# Altium PCB 2002A.PcbDoc
Units mil, origin at the board's own origin, x right, y up, seen from the top; angles counter-clockwise.
Board outline 4300 x 2895 mil, 2 copper layers (Top Layer, Bottom Layer); 26 components, 37 nets, 150 pads, 1 vias.
Unrouted connection lines stored in the file: 1.
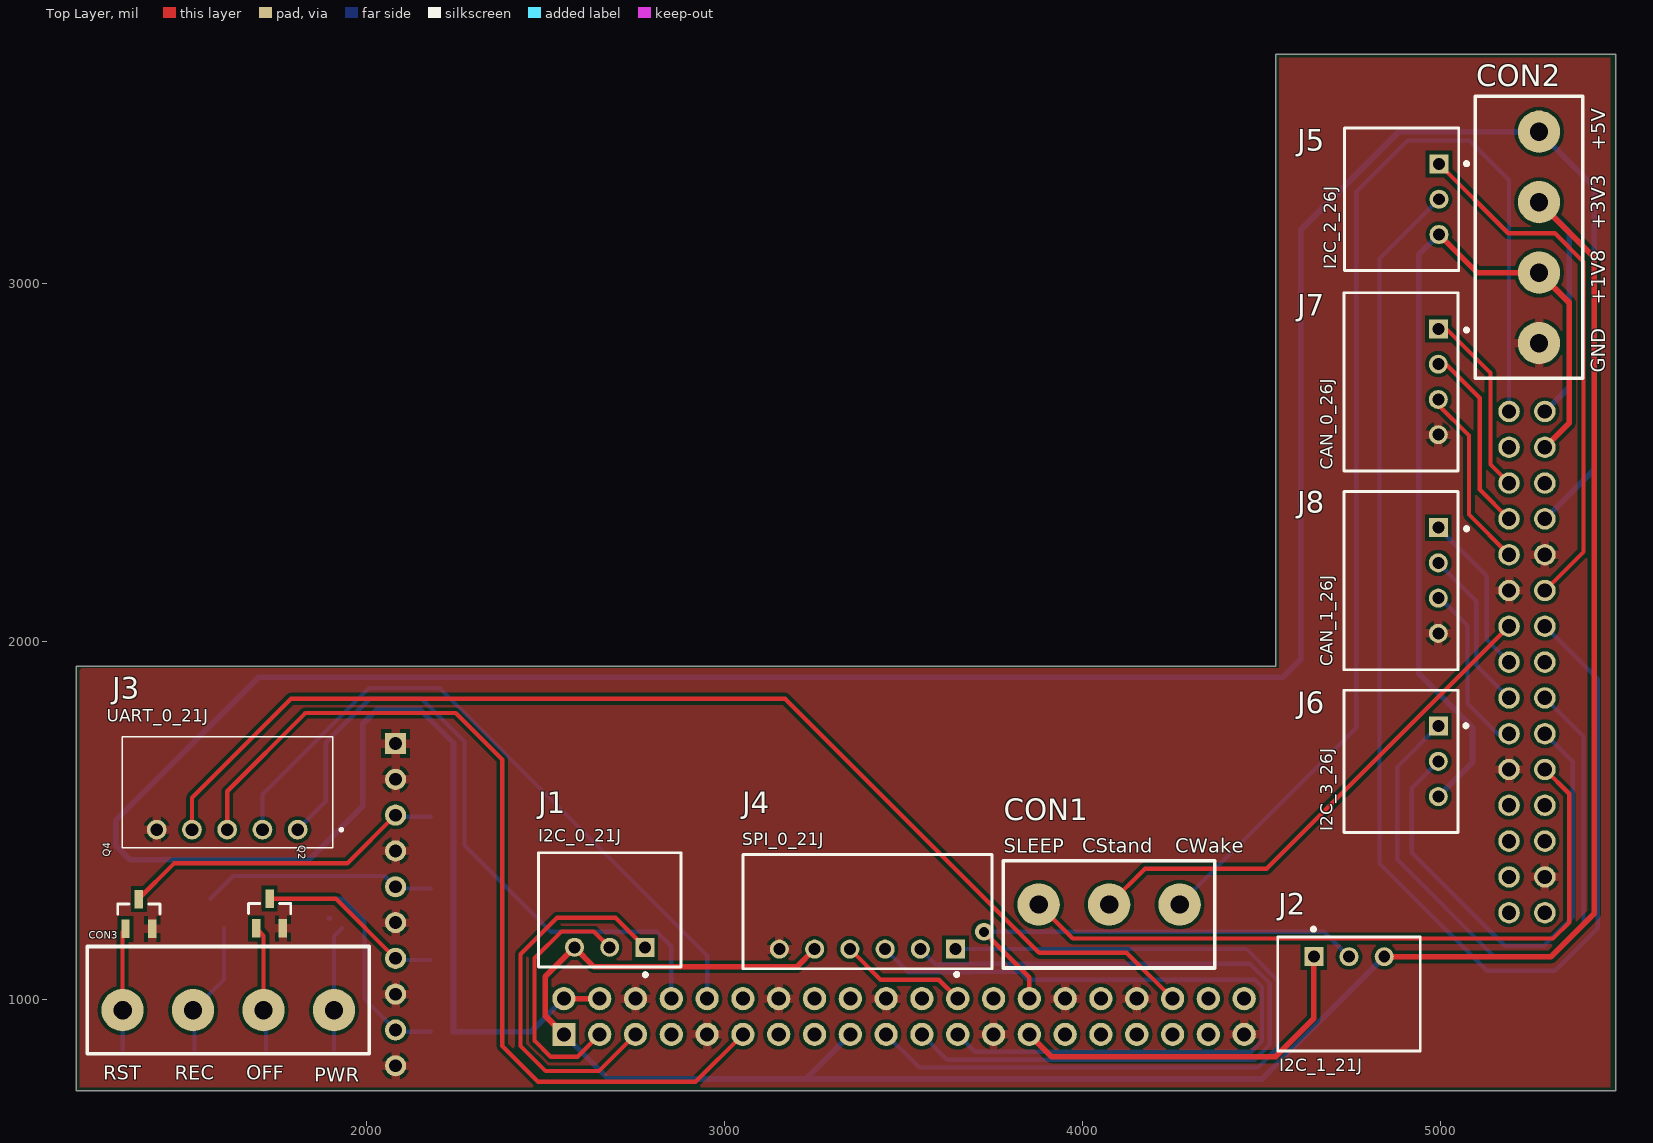
[diagram p0: Top Layer view]
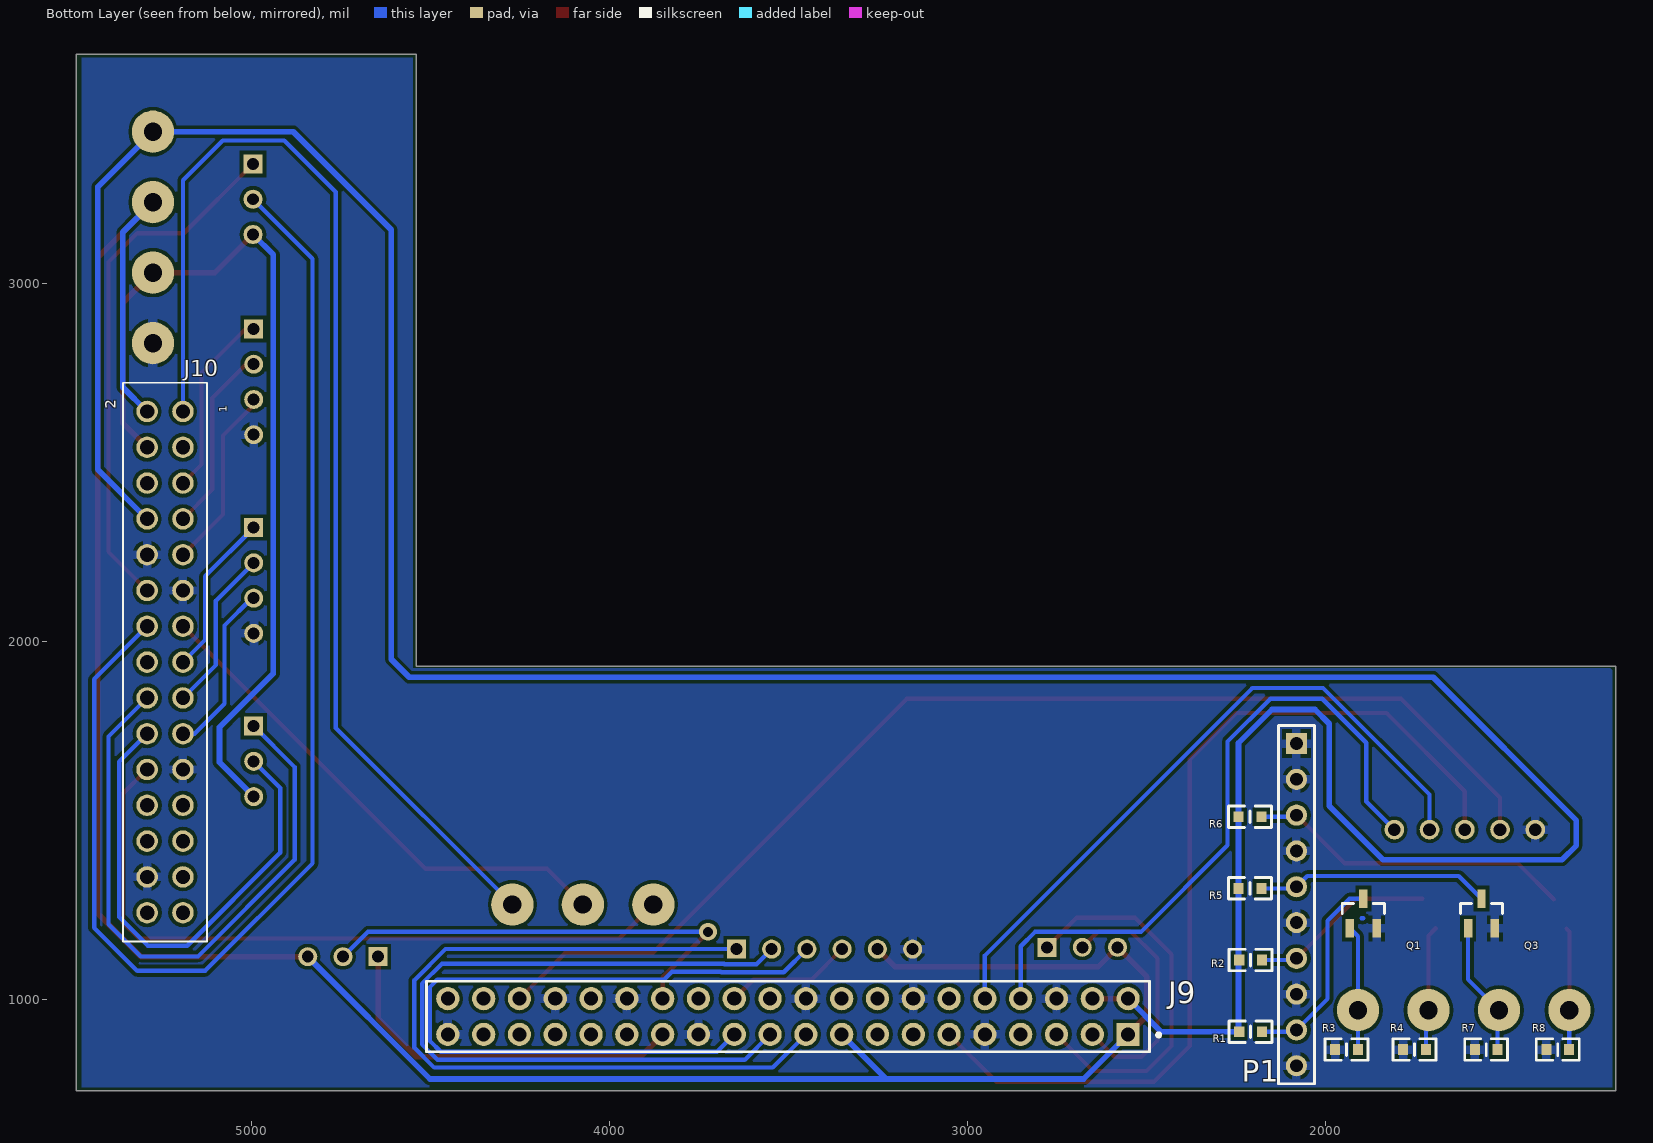
[diagram p1: Bottom Layer view, seen from below]
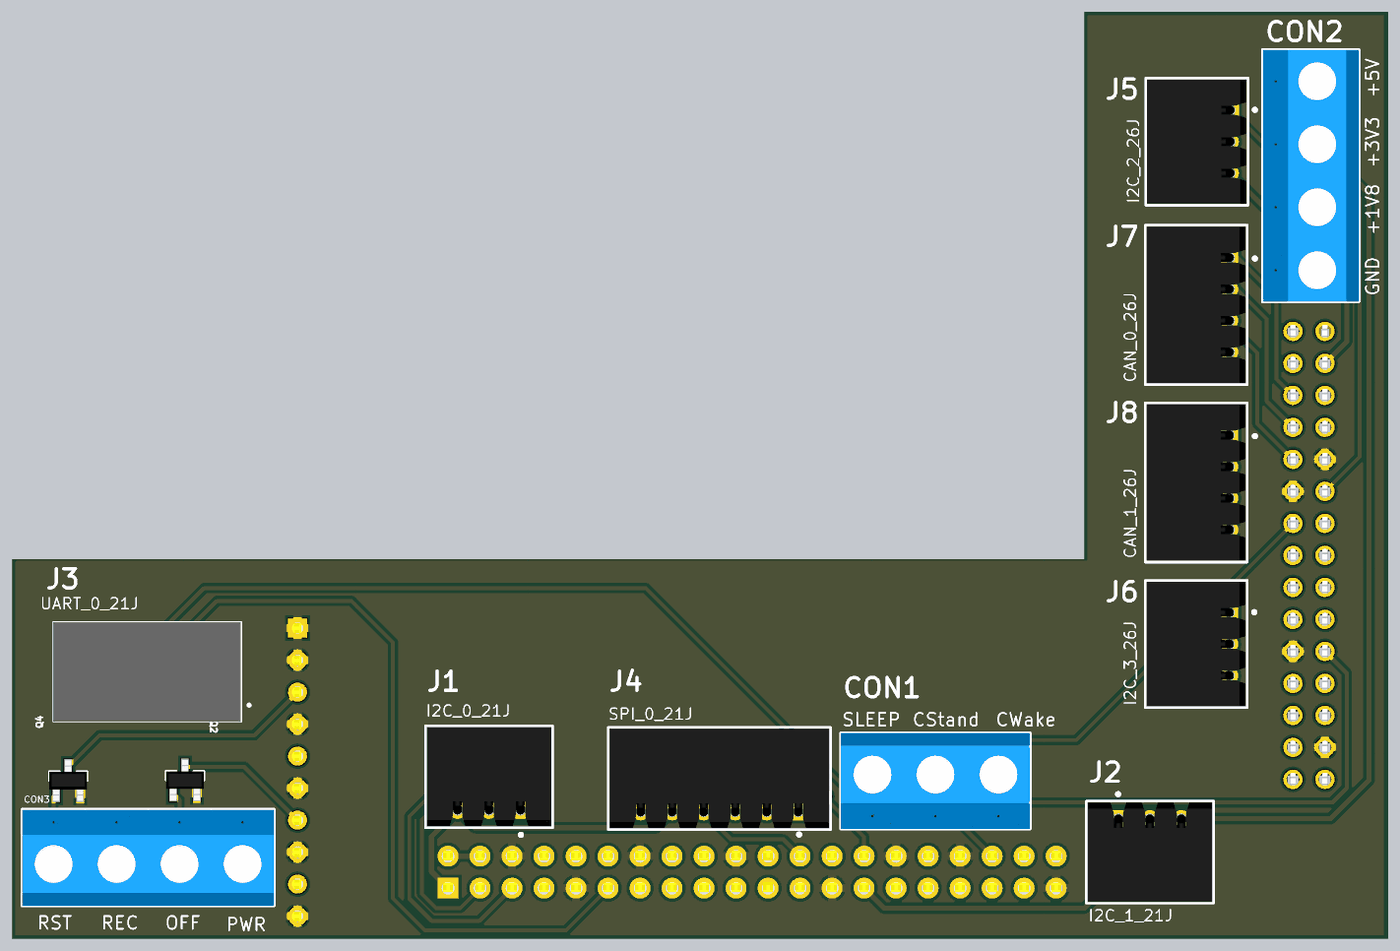
[diagram p2: 3D render of the assembled board from above, using the file's embedded part models]
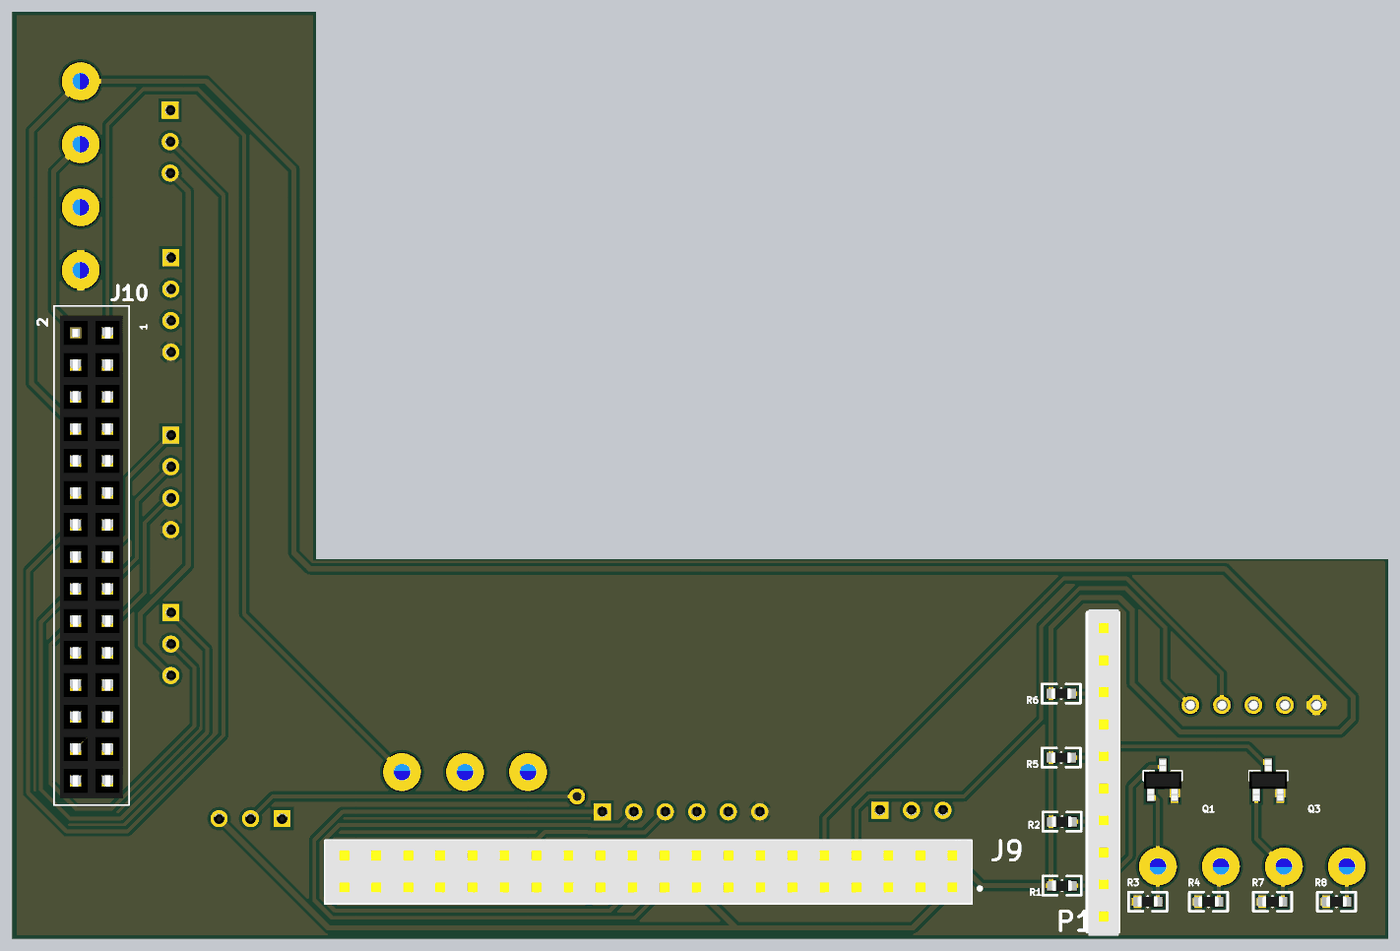
[diagram p3: 3D render of the assembled board from below, using the file's embedded part models]

## Layer stack, top to bottom
Top Solder: solder mask 0.4, Solder Resist, Dk 3.5
Top Layer: signal copper 1.4
Dielectric 1: dielectric 12.6, FR-4, Dk 4.8
Bottom Layer: signal copper 1.4
Bottom Solder: solder mask 0.4, Solder Resist, Dk 3.5

## Board outline
1190,1930 4540.25,1930 4540.25,2520 4540.25,3640 5490,3640 5490,745 1190,745

## Design rules (kind name [scope] priority, off if disabled: settings)
Clearance [All] p1: gap=10 ignorepadtopadclearanceinfootprint=FALSE except(0: Arc-Hole Track-Hole SMDPad-Hole THPad-Hole Via-Hole Fill-Hole Poly-Hole Region-Hole Text-Hole)
DiffPairsRouting [All] p1: maxlimit=16 minlimit=12 mostfreqgap=14 toplayer_minwidth=15 toplayer_maxwidth=15 toplayer_prefwidth=15 bottomlayer_minwidth=15 bottomlayer_maxwidth=15 bottomlayer_prefwidth=15 maxuncoupledlength=500
PlaneConnect [All] p1: planeconnectstyle=Relief reliefexpansion=20 reliefentries=4 reliefconductorwidth=16 reliefairgap=10
PolygonConnect [All] p1: connectstyle=Relief reliefconductorwidth=25 reliefentries=4 polygonreliefangle="90 Angle" airgapwidth=10
RoomDefinition 2002A [InComponentClass('2002A')] p1: confinementstyle=ConfineIn formatcopy=TRUE lockcomponents=FALSE outline 0,0 5500,0 5500,3650 0,3650
RoutingVias [All] p1: holewidth=28 width=50 viastyle="Through Hole" minholewidth=28 minwidth=50 maxholewidth=28 maxwidth=50
SolderMaskExpansion [All] p1: expansion=4
Width [All] p1: maxlimit=16 minlimit=12 preferedwidth=12
28 further rules are at their usual default settings.

## Components (designator, comment, footprint, x,y, rotation, side; value= is the part's Value field where it differs from the comment)
CON1 "ARK3" ARK3 4370.28,1387.05 r180 top
CON2 "ARK4" ARK4 5397.92,2734.72 r90 top
CON3 "ARK4" ARK4 1221.02,847.95 r0 top
J1 "I2C_0_21J" Molex_22-05-7035_MFG 2680,1250 r0 top
J2 "I2C_1_21J" Molex_22-05-7035_MFG 4745,1015 r180 top
J3 "UART_0_21J" 0022057055 1808.43,1474.21 r0 top
J4 "SPI_0_21J" Molex_22-05-7065_0 3400,1245 r0 top
J5 "I2C_3_J26" Molex_22-05-7035_MFG 4891.97,3235 r90 top
J6 "I2C_3_J26" Molex_22-05-7035_MFG 4890,1665 r90 top
J7 "CAN_0_J26" Molex_22-05-7045_0 4890,2725 r90 top
J8 "CAN_0_J26" Molex_22-05-7045_0 4890,2170 r90 top
J9 "Input from J21" SSW-120-XX-X-D 3502.05,952.2 r180 bottom locked
J10 "SAMTEC-BCS-120-X-S-TE" SSW-115-XX-XXX-D 5242.05,1942.2 r90 bottom locked
P1 "HDR1X10" HDR1X10 2081.79,1714.72 r270 bottom
Q1 "2N7002" SOT23 1895,1240 r90 bottom
Q2 "2N7002" SOT23 1730,1240 r90 top
Q3 "2N7002" SOT23 1565,1240 r90 bottom
Q4 "2N7002" SOT23 1365,1238.66 r90 top
R1 "1k" 0603 2177.85,910 r0 bottom
R2 "1k" 0603 2177.85,1110 r0 bottom
R3 "1k" 0603 1910,860 r0 bottom
R4 "100k" 0603 1720,860 r0 bottom
R5 "100k" 0603 2180,1310 r0 bottom
R6 "100k" 0603 2180,1510 r0 bottom
R7 "100k" 0603 1520,860 r0 bottom
R8 "100k" 0603 1320,860 r0 bottom

## Footprints (in the part's own frame and the unit in brackets; to place one, negate y for a bottom-side part, rotate by r counter-clockwise, add the part's x,y. Pads: shape width x height; smd on the part's side, far side on the other; paste and mask are expansions set on the pad)
0603 [mil]
  rect 28x30 smd: 1(0,0) 2(63.78,0)
  silkscreen extent -28,-30 92,30, body extent 0,-16 64,16, height 32
0022057055 [mm]
  round 1.4 hole 0.9: 1(0,0) 2(-2.5,0) 3(-5,0) 4(-7.5,0) 5(-10,0)
  silkscreen extent -12.45,-1.3 3.2,6.6, body extent -12.45,-1.3 2.45,6.6, height 5.2
ARK3 [mm]
  round 3 hole 1.3: 1(2.5,3.1) 2(7.5,3.1) 3(12.5,3.1)
  silkscreen extent 0,0 15,7.6, body extent 0,0 15,7.6, height 10
ARK4 [mm]
  round 3 hole 1.3: 1(2.5,3.1) 2(7.5,3.1) 3(12.5,3.1) 4(17.5,3.1)
  silkscreen extent 0,0 20,7.62, body extent 0,0 20,7.6, height 10
HDR1X10 [mm] "Connector; Header; 10 Position"
  rect 1.5x1.5 hole 0.9: 1(0,0)
  round 1.5 hole 0.9: 2(2.54,0) 3(5.08,0) 4(7.62,0) 5(10.16,0) 6(12.7,0) 7(15.24,0) 8(17.78,0) 9(20.32,0) 10(22.86,0)
  silkscreen extent -1.27,-1.27 24.13,1.27, body extent -1.51,-1.16 24.4,1.26, height 8.52
Molex_22-05-7035_MFG [mm]
  rect 1.35x1.35 hole 0.85 paste-1000 mask+0: 1(2.5,-2.65)
  round 1.35 hole 0.85 paste-1000 mask+0: 2(0,-2.65) 3(-2.5,-2.65)
  silkscreen extent -5.05,-4.72 5.05,4.05, body extent -5.15,-4.15 5.15,4.15, height 0.25
Molex_22-05-7045_0 [mm]
  rect 1.35x1.35 hole 0.85 paste-1000 mask+0: 1(3.75,-2.65)
  round 1.35 hole 0.85 paste-1000 mask+0: 2(1.25,-2.65) 3(-1.25,-2.65) 4(-3.75,-2.65)
  silkscreen extent -6.32,-4.78 6.32,4.05, body extent -6.43,-4.15 6.43,4.15, height 0.25
Molex_22-05-7065_0 [mm]
  rect 1.35x1.35 hole 0.85 paste-1000 mask+0: 1(6.25,-2.65)
  round 1.35 hole 0.85 paste-1000 mask+0: 2(3.75,-2.65) 3(1.25,-2.65) 4(-1.25,-2.65) 5(-3.75,-2.65) 6(-6.25,-2.65)
  silkscreen extent -8.82,-4.57 8.82,4.05, body extent -8.93,-4.15 8.93,4.15, height 0.25
SOT23 [mm]
  rect 1.3x0.6 smd: 1(-1.05,0.95) 2(-1.05,-0.95) 3(1.05,0)
  silkscreen extent 0,-1.5 0.7,1.5, body extent -1.6,-1.5 1.6,1.5, height 1.1
SSW-115-XX-XXX-D [mil]
  round 60 hole 40: 1(700,-50) 2(700,50) 3(600,-50) 4(600,50) 5(500,-50) 6(500,50) 7(400,-50) 8(400,50) 9(300,-50) 10(300,50) 11(200,-50) 12(200,50) 13(100,-50) 14(100,50) 15(0,-50) 16(0,50) 17(-100,-50) 18(-100,50) 19(-200,-50) 20(-200,50) 21(-300,-50) 22(-300,50) 23(-400,-50) 24(-400,50) 25(-500,-50) 26(-500,50) 27(-600,-50) 28(-600,50) 29(-700,-50) 30(-700,50)
  silkscreen extent -780,-118 780,118, body extent -760,-98 750,98, height 335
SSW-120-XX-X-D [mm] "2.54mm pitch, 40 pin, socket strip; double row"
  rect 1.65x1.65 / inner round 1.65 / far side rect 1.65x1.65 hole 1 mask+0: 1(24.13,-1.27)
  round 1.65 hole 1 mask+0: 2(24.13,1.27) 3(21.59,-1.27) 4(21.59,1.27) 5(19.05,-1.27) 6(19.05,1.27) 7(16.51,-1.27) 8(16.51,1.27) 9(13.97,-1.27) 10(13.97,1.27) 11(11.43,-1.27) 12(11.43,1.27) 13(8.89,-1.27) 14(8.89,1.27) 15(6.35,-1.27) 16(6.35,1.27) 17(3.81,-1.27) 18(3.81,1.27) 19(1.27,-1.27) 20(1.27,1.27) 21(-1.27,-1.27) 22(-1.27,1.27) 23(-3.81,-1.27) 24(-3.81,1.27) 25(-6.35,-1.27) 26(-6.35,1.27) 27(-8.89,-1.27) 28(-8.89,1.27) 29(-11.43,-1.27) 30(-11.43,1.27) 31(-13.97,-1.27) 32(-13.97,1.27) 33(-16.51,-1.27) 34(-16.51,1.27) 35(-19.05,-1.27) 36(-19.05,1.27) 37(-21.59,-1.27) 38(-21.59,1.27) 39(-24.13,-1.27) 40(-24.13,1.27)
  silkscreen extent -25.65,-2.5 26.42,2.5, body extent -25.65,-2.41 25.65,2.54, height 8.52

## Part data
CON1: "Z彻cze 渞ubowe 3 piny"
CON2 CON3: "Z彻cze 渞ubowe 4 piny"
J1: library part 22-05-7035, "I2C0"
J2: library part 22-05-7035, "I2C1"
J3: library part 0022057055, "Connector", Manufacturer_Name=Molex, Mouser Part Number=N/A, Arrow Part Number=0022057055, Datasheet Link=https://www.molex.com/pdm_docs/sd/022057055_sd.pdf, Height=5.1mm, Manufacturer_Part_Number=0022057055, Mouser Price/Stock=https://www.mouser.com/Search/Refine.aspx?Keyword=N%2FA
J4: library part 22-05-7065
J5: library part 22-05-7035, "I2C2"
J6: library part 22-05-7035, "I2C3"
J7: library part 22-05-7045, "CAN0"
J8: library part 22-05-7045, "CAN1"
J9: library part SAMTEC-BCS-120-X-S-TE, "20 Position Receptacle Connector Through Hole", Package=None, Availability=Unavailable, MF=Samtec, MP=BCS-120-S-S-TE, Price=None, SnapEDA_Link=https://www.snapeda.com/parts/BCS-120-S-S-TE/Samtec/view-part/2820457/?ref=snap
J10: "20 Position Receptacle Connector Through Hole", Package=None, Availability=Unavailable, MF=Samtec, MP=BCS-120-S-S-TE, Price=None, SnapEDA_Link=https://www.snapeda.com/parts/BCS-120-S-S-TE/Samtec/view-part/2820457/?ref=snap
P1: "Header, 10-Pin", LatestRevisionDate=17-Jul-2002, LatestRevisionNote="Re-released for DXP Platform.", Publisher="Altium Limited"
R1 R2 R3 R4 R5 R6 R7 R8: library part RES, "Resistior"

## Via types
v1: diameter 50, hole 28, Top Layer to Bottom Layer, 1 vias

## Nets (pads, with @x,y where several pads share a name; then routed paths per layer and width w, separated by ;. In a path a pad name is that pad's centre, name@x,y a point inside that pad or via, vN(x,y) a via of type N, cw(c..) or ccw(c..) an arc to the next point about the centre after c; other vN are vias at no path point)
+1V8: CON2.2 J5.3 J6.3 J10.4 | length 2569.6
  Top Layer w16: J5.3 5102.87,3030 CON2.2 5360,2945.88 5360,2610.16 J10.4
  Bottom Layer w16: J6.3 5090,1662.24 5090,1760 4940,1910 4940,3080.28 J5.3
+3V3: CON2.3 J1.3 J2.3 J4.5 J9.1 J9.17 J10.2 | length 7006
  Top Layer w16: J9.1 2500,954.25 2500,1064.09 J1.3 2636.24,1091 3202.69,1091 J4.5 ; J2.3 5309.33,1119.33 5430,1240 5430,3072.73 CON2.3
  Bottom Layer w16: J9.1 2676.25,778 4502.09,778 J2.3 ; 3228.92,779.08 J9.17 ; CON2.3 5360,3142.73 5360,2710.16 J10.2
+5V: CON2.4 J9.2 J9.4 J10.8 R1.2 R2.2 R5.2 R6.2 | length 9310.8
  Top Layer w16: J9.2 J9.4
  Bottom Layer w16: R1.2 R1.2@2243.78,910 ; J9.2 2459.84,910 R1.2@2243.78,910 ; J10.8 5430,2480.16 5430,3269.58 CON2.4 4883.7,3423.7 4610,3150 4610,1950 4560,1900 1700,1900 1300,1500 1300,1430 1340,1390 1840,1390 1990,1540 1990,1770 2030,1810 2150,1810 2243.78,1716.22 R6.2 R5.2 R1.2@2243.78,910
C_SLEEP: CON1.3 J10.22 | length 1995.2
  Top Layer w12: CON1.3 3973.15,1170 5315,1170 5360,1215 5360,1574.25 J10.22
CAN0_ERR: J7.3 J10.9 | length 515.5
  Top Layer w12: J7.3 4994.33,2660.67 5080,2575 5080,2354.25 J10.9
CAN0_RX: J7.1 J10.5 | length 525.8
  Top Layer w12: J7.1 5017.36,2872.64 5140,2750 5140,2494.25 J10.5
CAN0_TX: J7.2 J10.7 | length 526.5
  Top Layer w12: J7.2 5015.79,2774.21 5110,2680 5110,2424.25 J10.7
CAN1_ERR: J8.3 J10.19 | length 482.6
  Bottom Layer w12: J8.3 4999.7,2120.79 5075.91,2044.58 5075.91,1825.91 5159.61,1742.2 J10.19
CAN1_RX: J8.1 J10.15 | length 457.3
  Bottom Layer w12: J8.1 5130,2181.97 5130,2004.25 J10.15
CAN1_TX: J8.2 J10.17 | length 458.9
  Bottom Layer w12: J8.2 5100,2113.54 5100,1934.25 J10.17
CANStand: CON1.2 J10.13 | length 1439
  Top Layer w12: CON1.2 4175,1365 4514.84,1365 J10.13
CANWake: CON1.1 J10.1 | length 3372.9
  Bottom Layer w12: CON1.1 4765,1758.15 4765,3255 4909.2,3399.2 5080.8,3399.2 5192.05,3287.95 J10.1
GND: CON2.1 J3.5 J4.6 J7.4 J8.4 J9.6 J9.9 J9.14 J9.20 J9.25 J9.30 J9.34 J9.39 J10.10 J10.11 J10.21 J10.28 P1.1 P1.2 P1.4 P1.6 P1.8 P1.10 Q1.2 Q2.2 Q3.2 Q4.2 R3.2 R4.2 R7.2 R8.2
I2C_CLK0: J1.1 J9.5 | length 1072.2
  Top Layer w12: J9.5 2649.84,800 2501,800 2431,870 2431,1126 2533,1228 2696.09,1228 J1.1
I2C_CLK1: J2.1 J9.27 | length 1037.2
  Top Layer w16: J9.27 3914.25,840 4540,840 4646.57,946.57 J2.1
I2C_CLK2: J5.1 J10.12 | length 1479.5
  Top Layer w12: J5.1 5189.72,3140 5320,3140 5400,3060 5400,2250.16 J10.12
I2C_CLK3: J6.1 J10.18 | length 1766.8
  Bottom Layer w12: J6.1 4880,1649.09 4880,1390 5150,1120 5310,1120 5400,1210 5400,1734.25 J10.18
I2C_DAT0: J1.2 J9.3 | length 715.9
  Top Layer w12: J9.3 2589.84,840 2515,840 2470,885 2470,1115 2545,1190 2635.67,1190 J1.2
I2C_DAT1: J2.2 J9.28 | length 1288.3
  Top Layer w12: v1(3725,1189) 3852.05,1061.95 J9.28
  Bottom Layer w12: v1(3725,1189) 4675.33,1189 J2.2
I2C_DAT2: J5.2 J10.14 | length 3611.3
  Bottom Layer w12: J5.2 4830,3068.7 4830,1380 5130,1080 5320,1080 5440,1200 5440,1894.25 J10.14
I2C_DAT3: J6.2 J10.20 | length 1421.1
  Bottom Layer w12: J6.2 4920,1590.67 4920,1410 5180,1150 5290,1150 5370,1230 5370,1664.25 J10.20
OFF_PIN: P1.7 Q2.3 R2.1 | length 518.8
  Top Layer w12: 1916.51,1280 P1.7
  Top Layer w13: Q2.3 1915.17,1281.34 1916.51,1280
  Bottom Layer w12: P1.7@2086.51,1110 R2.1
  Bottom Layer w13: P1.7 P1.7@2086.51,1110
OFF_SIG: CON3.3 Q2.1 R4.1 | length 350
  Top Layer w12: Q2.1 1713.15,1178.11 CON3.3
  Bottom Layer w12: CON3.3 1720,963.15 R4.1
PWR_PIN: P1.9 Q1.3 R1.1 | length 571.9
  Top Layer w13: P1.9 P1.9@2086.51,910
  Bottom Layer w12: 1895,1226.34 1900.05,1226.34 ; Q1.3 1933.66,1281.34 1995,1220 1995,1196.09 1995,1001.51 P1.9 ; P1.9@2086.51,910 R1.1 R1.1@2180,910
PWR_SIG: CON3.4 Q1.1 R3.1 | length 347.9
  Bottom Layer w12: R3.1 CON3.4 1910,1176.26 Q1.1
REC_PIN: P1.5 Q3.3 R5.1 | length 655.9
  Top Layer w13: P1.5 P1.5@2086.51,1310
  Bottom Layer w12: Q3.3 1628.66,1345 1683.66,1345 2051.51,1345 P1.5 ; P1.5@2086.51,1310 R5.1
REC_SIG: CON3.2 Q3.1 R7.1 | length 375.9
  Bottom Layer w12: R7.1 1520,966.3 CON3.2 1602.4,1056.1 Q3.1
RST_PIN: P1.3 Q4.3 R6.1 | length 916.2
  Top Layer w12: Q4.3@1363,1280 1463,1380 1947.08,1380 P1.3 P1.3@2086.51,1510
  Bottom Layer w12: P1.3@2086.51,1510 R6.1
RST_SIG: CON3.1 Q4.1 R8.1 | length 340.9
  Top Layer w12: CON3.1 1319.45,1189.17 Q4.1
  Bottom Layer w12: CON3.1 1320,969.45 R8.1
SPI_CS: J4.4 J9.24 | length 358.6
  Top Layer w12: J4.4 3436.46,1055 3599.25,1055 J9.24
SPI_MISO: J4.2 J9.21 | length 2206
  Bottom Layer w12: J4.2 3590.21,1098.09 3679.27,1098.09 3680.67,1099.5 4468.61,1099.5 4524,1044.11 4524,874.48 4481.24,831.72 3622.53,831.72 J9.21
SPI_MOSI: J4.1 J9.19 | length 2279.3
  Bottom Layer w12: J9.19 3544.53,809.72 4490.35,809.72 4546,865.37 4546,1053.23 4458.56,1140.67 J4.1
SPI_SC: J4.3 J9.23 | length 2131.5
  Bottom Layer w12: J4.3 3513.79,1076.09 3688.38,1076.09 3689.78,1077.5 3826.18,1077.5 3848.68,1055 4482,1055 4502,1035 4502,883.6 4472.13,853.72 3700.53,853.72 J9.23
UART_CTS: J3.4 J9.36 | length 3289.5
  Top Layer w12: J3.4 1513.15,1563.15 1790,1840 3170,1840 3880,1130 4124.25,1130 J9.36
UART_RTS: J3.3 J9.11 | length 2588.3
  Top Layer w12: J3.3 1611.57,1581.57 1830,1800 2250,1800 2380,1670 2380,870 2480,770 2919.84,770 J9.11
UART_RX: J3.2 J9.10 | length 1893.8
  Bottom Layer w12: J3.2 1710,1572.53 2007.47,1870 2205,1870 2952.05,1122.95 J9.10
UART_TX: J3.1 J9.8 | length 1893.7
  Bottom Layer w12: J3.1 1887.11,1552.89 1887.11,1717.11 2010,1840 2154.65,1840 2274.28,1720.37 2274.28,1430.72 2516.26,1188.74 2811.83,1188.74 2852.05,1148.53 J9.8
pads on no net: J9.7 J9.12 J9.13 J9.15 J9.16 J9.18 J9.22 J9.26 J9.29 J9.31 J9.32 J9.33 J9.35 J9.37 J9.38 J9.40 J10.3 J10.6 J10.16 J10.23 J10.24 J10.25 J10.26 J10.27 J10.29 J10.30

## Polygon pours and split planes (outlines as drawn)
GND on Top Layer "Top Layer-GND" (solid, pour order 4): 1200,1920 1200,755 5475,755 5475,3630 4550,3630 4550,1925 1205,1925
GND on Bottom Layer "Bottom Layer-GND" (solid, pour order 0): 1200,1920 1200,755 5475,755 5475,3630 4550,3630 4550,1925 1205,1925

## Silkscreen, mask and mechanical layers (free items; w line width, h text height)
Top Overlay:
  text "+5V" at 5460,3370 h40 r90
  text "+3V3" at 5460,3150 h40 r90
  text "I2C_2_26J" at 4710,3040 h35 r90
  text "+1V8" at 5460,2940 h40 r90
  text "GND" at 5460,2750 h40 r90
  text "CAN_0_26J" at 4700,2480 h35 r90
  text "CAN_1_26J" at 4700,1930 h35 r90
  text "UART_0_21J" at 1275,1775 h35
  text "I2C_3_26J" at 4700,1470 h35 r90
  text "I2C_0_21J" at 2480,1440 h35
  text "SPI_0_21J" at 3050,1430 h35
  text "SLEEP" at 3780,1410 h40
  text "CStand" at 4000,1410 h40
  text "CWake" at 4260,1410 h40
  text "I2C_1_21J" at 4550,800 h35
  text "RST" at 1265,775 h40
  text "REC" at 1465,775 h40
  text "OFF" at 1665,775 h40
  text "PWR" at 1855,770 h40

## Text inside footprints (layer, text, board x,y; h text height)
J10: Bottom Overlay "2" at 5380,2650 h30 r270; Bottom Overlay "1" at 5070,2640 h20 r270